# EAGLE board et312 (EAGLE 7.1.0)

Size 192.05 x 114.99 mm. Coordinates in mm from the lower left corner, seen from the top.
Outline: 32.05,0 192.05,0 192.05,100 32.05,100 32.05,0
Copper layers (1*16): Top 0.035mm / dielectric 1.5mm / Bottom 0.035mm
Design rules "default": minimum track width 10mil, minimum drill 24mil, track to track 8mil, track to pad 8mil, pad to pad 8mil, via to via 8mil, smd to smd 8mil, copper to edge 40mil, drill to drill 8mil, minimum pad ring 10mil, minimum via ring 8mil, stop-mask expansion 4mil, vias tented up to drill 0mil, thermal gap 10mil
Net classes: 0 default: width 0.4 mm; 1 signal: width 0.254 mm; 2 pwr: width 2 mm

## Footprints (pad centres in the part's own frame; a part is rotated, then mirrored left to right if it is on the bottom)
1X10 = drill 1.016 pad 1.88: 1 0,0; 2 2.54,0; 3 5.08,0; 4 7.62,0; 5 10.16,0; 6 12.7,0; 7 15.24,0; 8 17.78,0; 9 20.32,0; 10 22.86,0
CPOL-RADIAL-100UF-25V = drill 0.7 pad 1.651 square: 1 1.27,0 | drill 0.7 pad 1.651: 2 -1.27,0
CAP-PTH-SMALL = drill 0.7 pad 1.651: 1 0,0; 2 2.54,0
E2,5-6 = drill 0.813 pad 1.6: + -1.27,0 | drill 0.813 pad 1.6 octagon: - 1.27,0
E3,5-10 = drill 0.813 pad 1.6: + -1.778,0 | drill 0.813 pad 1.6 octagon: - 1.778,0
C050-025X075 = drill 0.813 octagon: 1 -2.54,0; 2 2.54,0
E2,5-5 = drill 0.813 pad 1.6: + -1.27,0 | drill 0.813 pad 1.6 octagon: - 1.27,0
DO41-10 = drill 1.118: A 5.08,0; C -5.08,0
DO41-10' = drill 1.118 pad 1.93: A 5.08,0; C -5.08,0
DIL14 = drill 0.813 long: 1 -7.62,-3.81; 2 -5.08,-3.81; 3 -2.54,-3.81; 4 0,-3.81; 5 2.54,-3.81; 6 5.08,-3.81; 7 7.62,-3.81; 8 7.62,3.81; 9 5.08,3.81; 10 2.54,3.81; 11 0,3.81; 12 -2.54,3.81; 13 -5.08,3.81; 14 -7.62,3.81
DIP08 = drill 0.813 pad 1.727 octagon: 1 -3.81,-3.81; 2 -1.27,-3.81; 3 1.27,-3.81; 4 3.81,-3.81; 5 3.81,3.81; 6 1.27,3.81; 7 -1.27,3.81; 8 -3.81,3.81
TO220H = drill 1.118 long: 1 -2.54,-10.16; 2 0,-10.16; 3 2.54,-10.16 | hole 3.302: 0,4.826
DIL08 = drill 0.813 pad 1.27: 1 -3.81,-3.81; 2 -1.27,-3.81; 3 1.27,-3.81; 4 3.81,-3.81; 5 3.81,3.81; 6 1.27,3.81; 7 -1.27,3.81; 8 -3.81,3.81
DEANS = drill 1.27 pad 3.556 long: + 0,0; - 0.737,-6.921
2X08 = drill 1.016 octagon: 1 -8.89,-1.27; 2 -8.89,1.27; 3 -6.35,-1.27; 4 -6.35,1.27; 5 -3.81,-1.27; 6 -3.81,1.27; 7 -1.27,-1.27; 8 -1.27,1.27; 9 1.27,-1.27; 10 1.27,1.27; 11 3.81,-1.27; 12 3.81,1.27; 13 6.35,-1.27; 14 6.35,1.27; 15 8.89,-1.27; 16 8.89,1.27
POWER_JACK_SLOT = drill 1 pad 2 long: GND@1 2.58,7.5; GND@2 7.58,10.8; PWR 2.58,13.8
0207/10 = drill 0.813 octagon: 1 -5.08,0; 2 5.08,0
LED3MM = drill 0.813 pad 1.676 octagon: A -1.27,0; K 1.27,0
TO220 = drill 1.118 long: 1 -2.54,-6.35; 2 0,-6.35; 3 2.54,-6.35 | hole 3.048: 0,11.176
TO92 = drill 0.813 octagon: 1 1.27,0; 2 0,1.905; 3 -1.27,0
UM1 = drill 0.7 pad 1.2: 1 -1.875,0; 2 -0.027,0; 3 1.875,0
0204/7 = drill 0.813 octagon: 1 -3.81,0; 2 3.81,0
LI10 = drill 1.321 octagon: A -2.54,-5.08; E 2.54,-5.08; S 0,5.08
0207/7 = drill 0.813 octagon: 1 -3.81,0; 2 3.81,0
ALPS_POT = drill 1 pad 1.88 square: P$1 7,-2.5; P$2 7,0; P$3 7,2.5 | drill 2 octagon: P$4 0,-4.4; P$5 0,4.4
JUDCOSPST = drill 2: P 3.556,-8.128; T -3.556,-8.128
42TL = drill 0.7 pad 1.3: 1 -2.54,-6.096; 2 0,-6.068; 3 2.54,-6.096; 4 2.54,6.096; 5 0,6.096; 6 -2.54,6.096 | hole 1.9: -7.353,0; 7.353,0
DIL40 = drill 0.813 long: 1 -24.13,-7.62; 2 -21.59,-7.62; 3 -19.05,-7.62; 4 -16.51,-7.62; 5 -13.97,-7.62; 6 -11.43,-7.62; 7 -8.89,-7.62; 8 -6.35,-7.62; 9 -3.81,-7.62; 10 -1.27,-7.62; 11 1.27,-7.62; 12 3.81,-7.62; 13 6.35,-7.62; 14 8.89,-7.62; 15 11.43,-7.62; 16 13.97,-7.62; 17 16.51,-7.62; 18 19.05,-7.62; 19 21.59,-7.62; 20 24.13,-7.62; 21 24.13,7.62; 22 21.59,7.62; 23 19.05,7.62; 24 16.51,7.62; 25 13.97,7.62; 26 11.43,7.62; 27 8.89,7.62; 28 6.35,7.62; 29 3.81,7.62; 30 1.27,7.62; 31 -1.27,7.62; 32 -3.81,7.62; 33 -6.35,7.62; 34 -8.89,7.62; 35 -11.43,7.62; 36 -13.97,7.62; 37 -16.51,7.62; 38 -19.05,7.62; 39 -21.59,7.62; 40 -24.13,7.62
T05A = drill 1.016 long: 1 -3.404,-8.89; 2 -1.702,-8.89; 3 0,-8.89; 4 1.702,-8.89; 5 3.404,-8.89
POT_EVJC20 = drill 0.8 pad 1.6: 1 -3,0; 1' -1,0; 2 -5,0; 2' 1,0; 3 5,0; 3' 3,0 | hole 3: -7.1,3.3; 7.1,3.3
LCD1602 = drill 0.8 long: 1 8,33.46; 2 10.54,33.46; 3 13.08,33.46; 4 15.62,33.46; 5 18.16,33.46; 6 20.7,33.46; 7 23.24,33.46; 8 25.78,33.46; 9 28.32,33.46; 10 30.86,33.46; 11 33.4,33.46; 12 35.94,33.46; 13 38.48,33.46; 14 41.02,33.46; 15 43.56,33.46; 16 46.1,33.46 | hole 2.8: 2.54,2.54; 2.54,33.46; 77.46,33.46; 77.46,2.54
STX3100 = drill 1.5 pad 2.54: 1 2.7,-0.1 | drill 1.5: 2 7.7,5; 3 7.7,2.3; 4 7.7,-2.5; 5 7.7,-5.2 | hole 1.5: 2.7,4.9; 2.7,-5.1; 7.7,-0.1

## Placement (x,y rotation side)
10WAY_RIBBON  M10SILK_FEMALE_PTH  [1X10]  -80.98,120.65 0 top  (outside the outline)
10WAY_RIBBON1  M10SILK_FEMALE_PTH  [1X10]  -107.65,120.65 0 top  (outside the outline)
C1  470uF  [CPOL-RADIAL-100UF-25V]  -11.13,121.92 0 top  (outside the outline)
C2  [CAP-PTH-SMALL]  -55.58,162.56 0 top  (outside the outline)
C3  [CAP-PTH-SMALL]  -60.66,162.56 0 top  (outside the outline)
C4  470uF  [CPOL-RADIAL-100UF-25V]  -18.75,121.92 0 top  (outside the outline)
C5  [E2,5-6]  -68.28,130.81 0 top  (outside the outline)
C6  [E3,5-10]  -78.44,107.95 0 top  (outside the outline)
C7  [E3,5-10]  -91.14,107.95 0 top  (outside the outline)
C8  [C050-025X075]  1.57,135.89 0 top  (outside the outline)
C9  100n  [C050-025X075]  -22.56,130.81 0 top  (outside the outline)
C10  100n  [C050-025X075]  -31.45,130.81 0 top  (outside the outline)
C11  1u  [C050-025X075]  -40.34,130.81 0 top  (outside the outline)
C12  1u  [E2,5-5]  -78.44,130.81 0 top  (outside the outline)
C13  1u  [E2,5-5]  -87.33,130.81 0 top  (outside the outline)
C14  1u  [E2,5-5]  -96.22,130.81 0 top  (outside the outline)
C15  100n  [C050-025X075]  -49.23,130.81 0 top  (outside the outline)
C16  100n  [C050-025X075]  -58.12,130.81 0 top  (outside the outline)
D1  1N4004  [DO41-10]  -12.4,130.81 0 top  (outside the outline)
D2  1N4004  [DO41-10']  13,130.81 0 top  (outside the outline)
D3  1N4004  [DO41-10']  0.3,130.81 0 top  (outside the outline)
IC1  LM324N  [DIL14]  -39.07,109.22 0 top  (outside the outline)
IC2  4066N  [DIL14]  -59.39,109.22 0 top  (outside the outline)
IC3  LM358  [DIP08]  -102.57,107.95 0 top  (outside the outline)
IC4  7809  [TO220H]  -96.22,50.8 0 top  (outside the outline)
IC5  LM358N  [DIL08]  13,121.92 0 top  (outside the outline)
IC6  7809  [TO220H]  10.46,74.93 0 top
J1  BATTERY_CONNDEANS  [DEANS]  2.84,114.3 0 top
J2  [2X08]  -32.72,119.38 0 top  (outside the outline)
JP1  POWER_JACKSLT  [POWER_JACK_SLOT]  -69.55,39.37 0 top  (outside the outline)
L1  [0207/10]  -8.59,135.89 0 top  (outside the outline)
LED1  [LED3MM]  -102.57,158.75 0 top  (outside the outline)
LED2  [LED3MM]  -112.73,158.75 0 top  (outside the outline)
Q1  IRL520N-H  [TO220]  -100.03,8.89 0 top  (outside the outline)
Q2  IRL520N-H  [TO220]  11.73,46.99 0 top
Q3  IRF9Z24  [TO220]  -3.51,46.99 0 top
Q4  IRL520N-H  [TO220]  -18.75,46.99 0 top  (outside the outline)
Q5  IRL520N-H  [TO220]  -33.99,46.99 0 top  (outside the outline)
Q6  IRF9Z24  [TO220]  -49.23,46.99 0 top  (outside the outline)
Q7  2N3906  [TO92]  -108.92,129.54 0 top  (outside the outline)
QF1  16M20AUM1  [UM1]  -51.77,120.65 0 top  (outside the outline)
R1  100k  [0207/10]  -21.29,135.89 0 top  (outside the outline)
R2  10k  [0207/10]  -33.99,135.89 0 top  (outside the outline)
R3  10k  [0207/10]  -46.69,135.89 0 top  (outside the outline)
R4  100k  [0207/10]  -59.39,135.89 0 top  (outside the outline)
R5  10k  [0207/10]  -72.09,135.89 0 top  (outside the outline)
R6  100k  [0207/10]  -84.79,135.89 0 top  (outside the outline)
R7  100k  [0207/10]  -97.49,135.89 0 top  (outside the outline)
R8  100k  [0207/10]  -110.19,135.89 0 top  (outside the outline)
R9  100k  [0207/10]  13,142.24 0 top  (outside the outline)
R10  200k  [0207/10]  0.3,142.24 0 top  (outside the outline)
R11  100k  [0207/10]  -12.4,142.24 0 top  (outside the outline)
R12  100k  [0207/10]  -25.1,142.24 0 top  (outside the outline)
R13  10k  [0207/10]  -37.8,142.24 0 top  (outside the outline)
R14  10k  [0207/10]  -50.5,142.24 0 top  (outside the outline)
R15  10k  [0207/10]  -63.2,142.24 0 top  (outside the outline)
R16  100k  [0207/10]  -75.9,142.24 0 top  (outside the outline)
R17  100k  [0207/10]  -88.6,142.24 0 top  (outside the outline)
R18  100k  [0207/10]  -101.3,142.24 0 top  (outside the outline)
R19  100k  [0207/10]  -114,142.24 0 top  (outside the outline)
R20  200k  [0207/10]  13,147.32 0 top  (outside the outline)
R21  100k  [0207/10]  0.3,147.32 0 top  (outside the outline)
R22  100k  [0207/10]  -12.4,147.32 0 top  (outside the outline)
R23  [0204/7]  -25.1,147.32 0 top  (outside the outline)
R24  [0204/7]  -37.8,147.32 0 top  (outside the outline)
R25  [LI10]  13,110.49 0 top
R26  390R  [0207/10]  -50.5,147.32 0 top  (outside the outline)
R27  100K  [0207/10]  -63.2,147.32 0 top  (outside the outline)
R28  100K  [0207/10]  -75.9,147.32 0 top  (outside the outline)
R29  390R  [0207/10]  -88.6,147.32 0 top  (outside the outline)
R30  10K  [0207/10]  -101.3,147.32 0 top  (outside the outline)
R31  100K  [0207/10]  -114,147.32 0 top  (outside the outline)
R32  20K  [0207/10]  13,152.4 0 top  (outside the outline)
R33  4.7K  [0207/10]  0.3,152.4 0 top  (outside the outline)
R34  4.7K  [0207/10]  -12.4,152.4 0 top  (outside the outline)
R35  100K  [0207/10]  -25.1,152.4 0 top  (outside the outline)
R36  20K  [0207/10]  -37.8,152.4 0 top  (outside the outline)
R37  1M  [0207/10]  -50.5,152.4 0 top  (outside the outline)
R38  20K  [0207/10]  -63.2,152.4 0 top  (outside the outline)
R39  1M  [0207/10]  -75.9,152.4 0 top  (outside the outline)
R40  10K  [0207/7]  14.27,162.56 0 top  (outside the outline)
R41  100K  [0207/10]  -88.6,152.4 0 top  (outside the outline)
R42  1M  [0207/10]  -101.3,152.4 0 top  (outside the outline)
R43  20K  [0207/10]  -114,152.4 0 top  (outside the outline)
R44  100K  [0207/10]  13,157.48 0 top  (outside the outline)
R45  100K  [0207/10]  0.3,157.48 0 top  (outside the outline)
R46  4.7K  [0207/10]  -12.4,157.48 0 top  (outside the outline)
R47  4.7K  [0207/10]  -25.1,157.48 0 top  (outside the outline)
R48  100K  [0207/10]  -37.8,157.48 0 top  (outside the outline)
R49  4.7K  [0207/10]  -50.5,157.48 0 top  (outside the outline)
R50  1M  [0207/10]  -63.2,157.48 0 top  (outside the outline)
R51  20K  [0207/10]  -75.9,157.48 0 top  (outside the outline)
R52  0.5R  [0207/10]  -88.6,157.48 0 top  (outside the outline)
RP1  20K  [0207/7]  4.11,162.56 0 top  (outside the outline)
RP5A  390  [0207/7]  -6.05,162.56 0 top  (outside the outline)
RP5B  390  [0207/7]  -16.21,162.56 0 top  (outside the outline)
RP5B1  47  [0207/7]  -26.37,162.56 0 top  (outside the outline)
RP6  100K  [0207/7]  -36.53,162.56 0 top  (outside the outline)
RP7  3.3K  [0207/7]  -46.69,162.56 0 top  (outside the outline)
RV2  [ALPS_POT]  -9.86,109.22 0 top
S1  SPST  [JUDCOSPST]  -77.17,72.39 0 top  (outside the outline)
S2  SPST  [JUDCOSPST]  -89.87,72.39 0 top  (outside the outline)
S3  SPST  [JUDCOSPST]  -102.57,72.39 0 top  (outside the outline)
S4  SPST  [JUDCOSPST]  13,93.98 0 top
T1  2N3904  [TO92]  9.19,137.16 0 top  (outside the outline)
TR1  42TL025  [42TL]  -91.14,91.44 0 top  (outside the outline)
TR2  42TL025  [42TL]  -108.92,91.44 0 top  (outside the outline)
U1  MEGA16-P  [DIL40]  -41.61,72.39 0 top  (outside the outline)
U9  7805  [TO220H]  -6.05,74.93 0 top  (outside the outline)
U$1  LM2941  [T05A]  -79.71,49.53 0 top  (outside the outline)
U$2  MAX548  [DIL08]  0.3,121.92 0 top  (outside the outline)
VR2  500KOHM, 50mW  [POT_EVJC20]  -83.52,27.94 0 top  (outside the outline)
VR3  [ALPS_POT]  -23.83,109.22 0 top  (outside the outline)
X1  HD44780LCD-1602  [LCD1602]  -61.93,1.27 0 top
X2  STEREOJACK  [STX3100]  -7.32,92.71 0 top
X3  STEREOJACK  [STX3100]  -25.1,92.71 0 top  (outside the outline)
X4  STEREOJACK  [STX3100]  -42.88,92.71 0 top  (outside the outline)
X5  STEREOJACK  [STX3100]  -60.66,92.71 0 top  (outside the outline)
X6  STEREOJACK  [STX3100]  -78.44,92.71 0 top  (outside the outline)

## Library data of the parts
10WAY_RIBBON 10WAY_RIBBON1 = SparkFun-Connectors; PROD_ID: CONN-11563
C1-C4 = SparkFun-Passives
C5-C16 L1 R23 R24 R26-R51 RP1 RP5A RP5B RP5B1 RP6 RP7 = rcl
D1 = diode
D2 D3 IC4 IC6 LED1 LED2 S1-S4 U9 X1-X6 = adafruit
IC1 IC5 = linear
IC2 = 40xx
IC3 = SparkFun-AnalogIC; PROD_ID: IC-09172
J1 = SparkFun-Connectors
J2 = pinhead
JP1 = SparkFun-Connectors; PROD_ID: PRT-00119
Q1-Q6 = transistor-fet-1
Q7 = transistor-pnp
QF1 = crystal; OC_FARNELL: unknown; OC_NEWARK: unknown
R1-R22 R52 = eagle-ltspice; SPICEMODEL: NONE; SPICEPREFIX: R
R25 = pot
RV2 VR3 = SparkFun-Electromechanical
T1 = transistor
TR1 TR2 = trafo-xicon; OC_FARNELL: unknown; OC_NEWARK: unknown
U1 = atmel; MPN: ATMEGA16-16PU; OC_FARNELL: 9171142; OC_NEWARK: 01M6885
U$1 U$2 = JAEB
VR2 = Panasonic-Trimmer_Potentiometers; MPN: EVJC20F02A14; OC_FARNELL: 2284569; OC_NEWARK: 52W2256; PACKAGE: TH-POT; SUPPLIER: PANASONIC

## Nets
5V: 10WAY_RIBBON1.6 IC2.14 J2.14 R25.E RP5A.2 RP5B1.2 RP5B.2 S1.P S3.P U1.10 U1.30 U1.32 U9.3 X1.2
!CS: U1.18 U$2.3
+5V: Q7.3 R28.1 R35.2 R42.2 R47.2
+9V1: C2.2 C4.1 IC6.3 Q3.3 R8.2
+9V2: C1.1 C3.2 IC4.3 Q6.3 R18.2
+12V: C8.1 D1.C IC4.1 IC6.1 J2.2 R40.2 U9.1
GND: 10WAY_RIBBON1.5 C1.2 C4.2 C5.- C6.- C7.- C8.2 C11.1 C12.- C13.- C14.- IC2.7 IC3.4 IC4.2 IC5.5 IC6.2 J1.- J2.10 J2.12 JP1.GND@1 JP1.GND@2 R1.1 R4.1 R7.1 R10.1 R12.1 R17.1 R20.1 R21.1 R24.1 R25.A R26.1 R30.2 R32.2 R36.2 R38.1 R41.2 R43.1 R44.2 R45.2 R48.1 R51.1 R52.1 RP1.1 RP7.1 T1.3 U1.11 U1.31 U9.2 U$1.2 U$1.3 U$2.1 X1.1 X2.1 X3.1
JTAG7: J2.7 U1.5
JTAG9: J2.9 U1.6 U$2.4
JTAG11: J2.11 U1.7
JTAG13: J2.13 U1.8 U$2.5
JTAG15-RESET: J2.15 U1.9
N$1: 10WAY_RIBBON.6 RV2.P$3 S2.P S4.P VR2.1 VR2.1' VR3.P$3
N$2: 10WAY_RIBBON.2 S2.T
N$3: 10WAY_RIBBON.1 S4.T
N$4: IC2.8 S1.T
N$5: IC2.11 S3.T
N$6: TR1.4 X5.1
N$7: 10WAY_RIBBON1.1 IC2.4
N$8: 10WAY_RIBBON1.2 IC2.1
N$9: R26.2 X4.1
N$10: 10WAY_RIBBON.9 VR2.3'
N$11: 10WAY_RIBBON.8 VR3.P$2
N$12: 10WAY_RIBBON.7 RV2.P$2
N$13: 10WAY_RIBBON.10 VR2.3
N$14: 10WAY_RIBBON.4 VR2.2'
N$15: 10WAY_RIBBON.3 VR2.2
N$16: TR1.6 X5.2 X5.5
N$17: QF1.3 U1.13
N$18: Q1.1 R2.2
N$19: Q2.1 R3.2
N$20: IC3.1 R5.1 R6.2
N$21: C2.1 Q3.1 R5.2
N$22: IC3.3 R7.2 R8.1 R11.2
N$23: LED2.A RP5B.1
N$24: Q4.1 R13.2
N$25: Q5.1 R14.2
N$26: IC3.7 R15.1 R16.2
N$27: C3.1 Q6.1 R15.2
N$28: IC3.6 R17.2 R18.1 R22.2
N$29: LED1.A RP5A.1
N$30: R25.S X1.3
N$31: C7.+ J1.+ L1.2
N$32: QF1.1 U1.12
N$33: R22.1 U$2.2
N$34: Q1.2 TR1.1
N$35: Q3.2 TR1.2
N$36: Q4.2 TR2.1
N$37: Q6.2 TR2.2
N$38: Q5.2 TR2.3
N$39: Q2.2 TR1.3
N$40: IC3.2 R6.1 R9.1 R10.2
N$41: IC3.5 R16.1 R19.1 R20.2
N$42: R11.1 U$2.7
N$43: R23.1 R24.2 U$1.1
N$44: R29.2 R30.1 X4.5
N$45: C6.+ D1.A R23.2 U$1.5
N$46: R27.2 X4.2
N$47: RP5B1.1 X1.15
N$48: R27.1 T1.2
N$49: TR2.6 X6.2 X6.5
N$50: TR2.4 X6.1
N$51: R31.2 R32.1
N$52: Q7.1 R29.1
N$53: IC1.2 R36.1 R37.1
N$54: D2.A IC1.1 IC1.12 R37.2
N$55: R33.1 X3.2
N$56: R34.1 X3.5
N$57: C9.1 R34.2
N$60: IC1.6 R38.2 R39.1
N$61: IC5.7
N$62: IC1.9 IC1.13 R41.1 R42.1
N$63: C10.2 IC1.5 R43.2
N$69: D3.A IC1.7 IC1.10 R39.2
N$71: R46.1 X2.2 X2.5
N$72: C14.+ C15.1 R46.2 R47.1
N$73: C15.2 IC5.3 R48.2
N$74: IC5.2 R50.1 R51.2
N$75: IC5.1 IC5.6 R49.2 R50.2
N$76: C16.1 R49.1
PA0: Q1.3 Q2.3 Q4.3 Q5.3 R52.2 U1.40
PA1: 10WAY_RIBBON1.3 C10.1 C11.2 U1.39
PA4: 10WAY_RIBBON1.8 R40.1 RP7.2 U1.36 U1.37
PA5: 10WAY_RIBBON1.7 RP1.2 RP6.1 U1.35 U1.38
PA6_AINB: C12.+ D2.C R44.1 U1.34
PA7_AINA: C13.+ D3.C R45.1 U1.33
PB0: R12.2 R13.1 U1.1
PB1: R14.1 R21.2 U1.2
PB2: R1.2 R2.1 U1.3
PB3: R3.1 R4.2 U1.4
PC0: IC2.5 IC2.6 IC2.12 IC2.13 U1.22
PC1: U1.23 X1.5
PC2: U1.24 X1.6
PC3: U1.25 X1.4
PC4: IC2.10 U1.26 X1.11
PC5: IC2.9 U1.27 X1.12
PC6: IC2.3 U1.28 X1.13
PC7: IC2.2 U1.29 X1.14
PD0: R28.2 T1.1 U1.14
PD1: Q7.2 R31.1 U1.15
PD2: IC1.14 U1.16
PD3: IC1.8 U1.17
PD5: LED2.K U1.19
PD6: LED1.K U1.20
PD7: U1.21 X1.16
RB4: 10WAY_RIBBON1.4 IC1.3
RB9: 10WAY_RIBBON1.9 C16.2 R33.2
RB10: 10WAY_RIBBON1.10 C9.2 R35.1
V+: C5.+ IC1.4 IC5.8 JP1.PWR L1.1 RP6.2 U$1.4
V-: IC1.11 IC5.4
VCC: IC3.8 R9.2 R19.2 U$2.6 U$2.8
VR4: 10WAY_RIBBON.5 RV2.P$1 VR3.P$1

## Tracks (layer width: path | path; a pad name or v marks a point on that pad's centre or on a via)
5V  (13 unrouted)
!CS  (1 unrouted)
+5V  (4 unrouted)
+9V1  (4 unrouted)
+9V2  (4 unrouted)
+12V  (6 unrouted)
GND  (54 unrouted)
JTAG7  (1 unrouted)
JTAG9  (2 unrouted)
JTAG11  (1 unrouted)
JTAG13  (2 unrouted)
JTAG15-RESET  (1 unrouted)
N$1  (6 unrouted)
N$2  (1 unrouted)
N$3  (1 unrouted)
N$4  (1 unrouted)
N$5  (1 unrouted)
N$6  (1 unrouted)
N$7  (1 unrouted)
N$8  (1 unrouted)
N$9  (1 unrouted)
N$10  (1 unrouted)
N$11  (1 unrouted)
N$12  (1 unrouted)
N$13  (1 unrouted)
N$14  (1 unrouted)
N$15  (1 unrouted)
N$16  (2 unrouted)
N$17  (1 unrouted)
N$18  (1 unrouted)
N$19  (1 unrouted)
N$20  (2 unrouted)
N$21  (2 unrouted)
N$22  (3 unrouted)
N$23  (1 unrouted)
N$24  (1 unrouted)
N$25  (1 unrouted)
N$26  (2 unrouted)
N$27  (2 unrouted)
N$28  (3 unrouted)
N$29  (1 unrouted)
N$30  (1 unrouted)
N$31  (2 unrouted)
N$32  (1 unrouted)
N$33  (1 unrouted)
N$34  (1 unrouted)
N$35  (1 unrouted)
N$36  (1 unrouted)
N$37  (1 unrouted)
N$38  (1 unrouted)
N$39  (1 unrouted)
N$40  (3 unrouted)
N$41  (3 unrouted)
N$42  (1 unrouted)
N$43  (2 unrouted)
N$44  (2 unrouted)
N$45  (3 unrouted)
N$46  (1 unrouted)
N$47  (1 unrouted)
N$48  (1 unrouted)
N$49  (2 unrouted)
N$50  (1 unrouted)
N$51  (1 unrouted)
N$52  (1 unrouted)
N$53  (2 unrouted)
N$54  (3 unrouted)
N$55  (1 unrouted)
N$56  (1 unrouted)
N$57  (1 unrouted)
N$60  (2 unrouted)
N$62  (3 unrouted)
N$63  (2 unrouted)
N$69  (3 unrouted)
N$71  (2 unrouted)
N$72  (3 unrouted)
N$73  (2 unrouted)
N$74  (2 unrouted)
N$75  (3 unrouted)
N$76  (1 unrouted)
PA0  (5 unrouted)
PA1  (3 unrouted)
PA4  (4 unrouted)
PA5  (4 unrouted)
PA6_AINB  (3 unrouted)
PA7_AINA  (3 unrouted)
PB0  (2 unrouted)
PB1  (2 unrouted)
PB2  (2 unrouted)
PB3  (2 unrouted)
PC0  (4 unrouted)
PC1  (1 unrouted)
PC2  (1 unrouted)
PC3  (1 unrouted)
PC4  (2 unrouted)
PC5  (2 unrouted)
PC6  (2 unrouted)
PC7  (2 unrouted)
PD0  (2 unrouted)
PD1  (2 unrouted)
PD2  (1 unrouted)
PD3  (1 unrouted)
PD5  (1 unrouted)
PD6  (1 unrouted)
PD7  (1 unrouted)
RB4  (1 unrouted)
RB9  (2 unrouted)
RB10  (2 unrouted)
V+  (6 unrouted)
V-  (1 unrouted)
VCC  (4 unrouted)
VR4  (2 unrouted)